# Altium PCB Kicker_PCB.PcbDoc
Units mil, origin at the board's own origin, x right, y up, seen from the top; angles counter-clockwise.
Board outline 2667.72 x 1696 mil, 2 copper layers (Top Layer, Bottom Layer); 49 components, 29 nets, 154 pads, 561 vias.
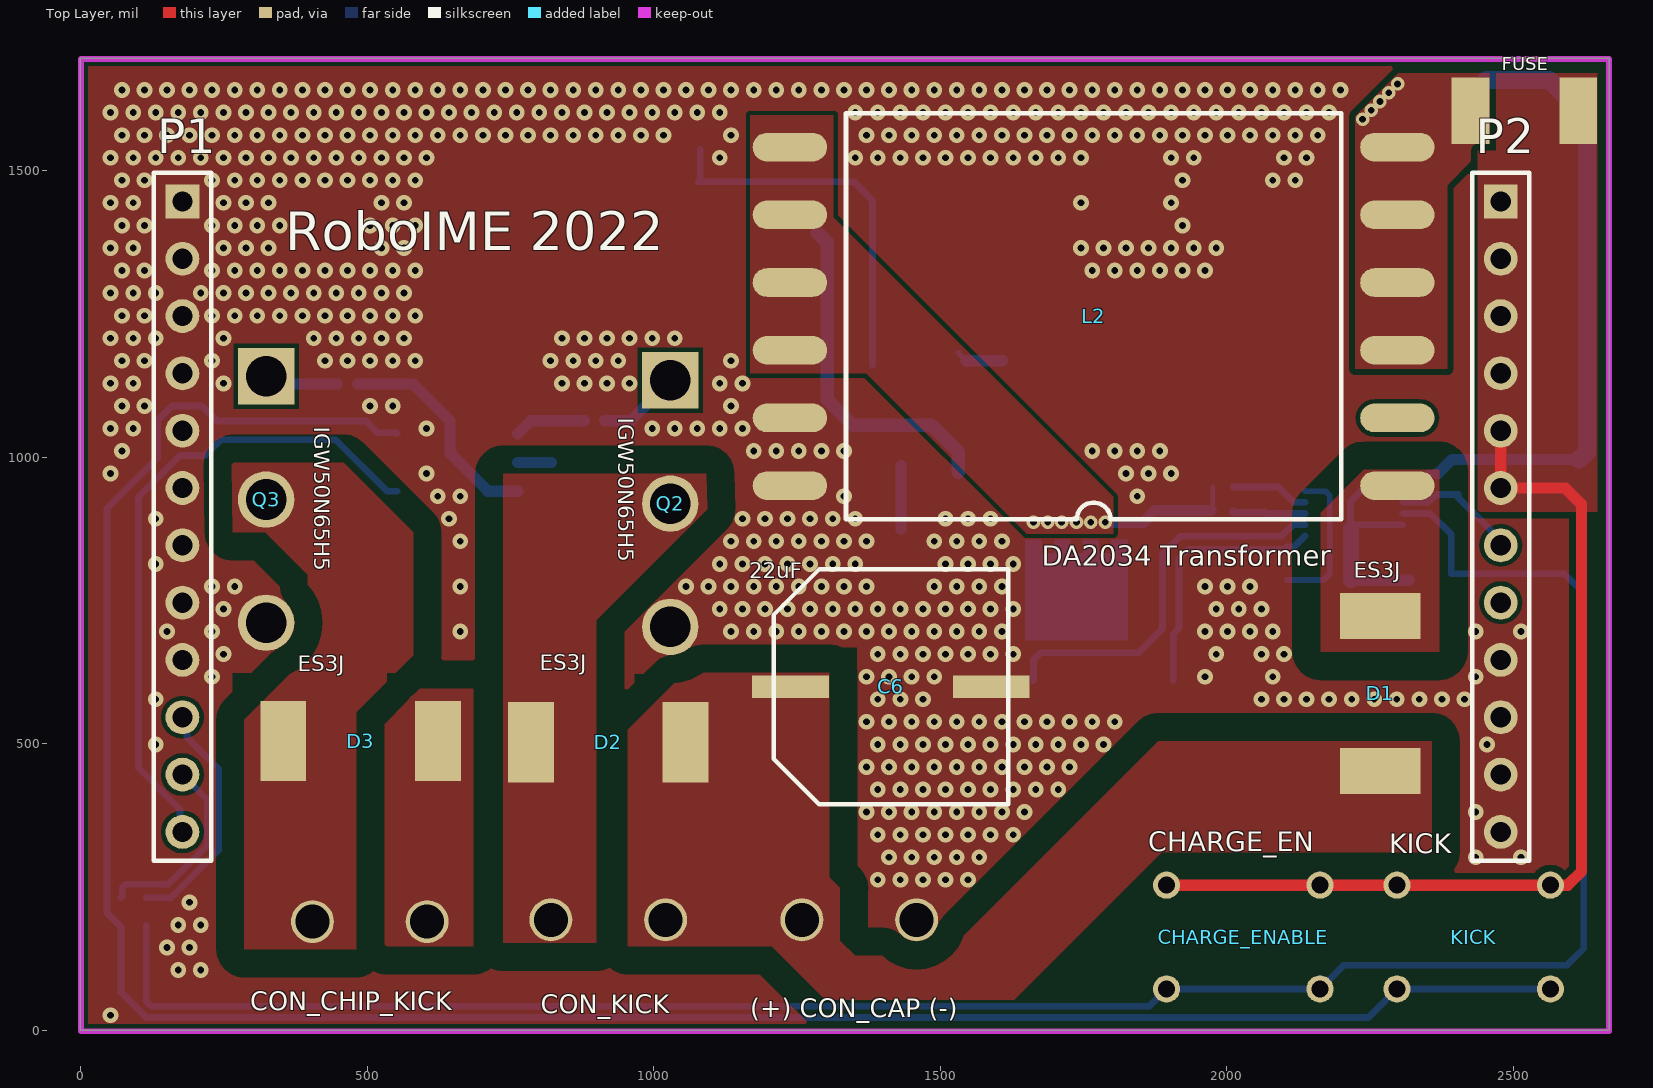
[diagram p0: Top Layer view]
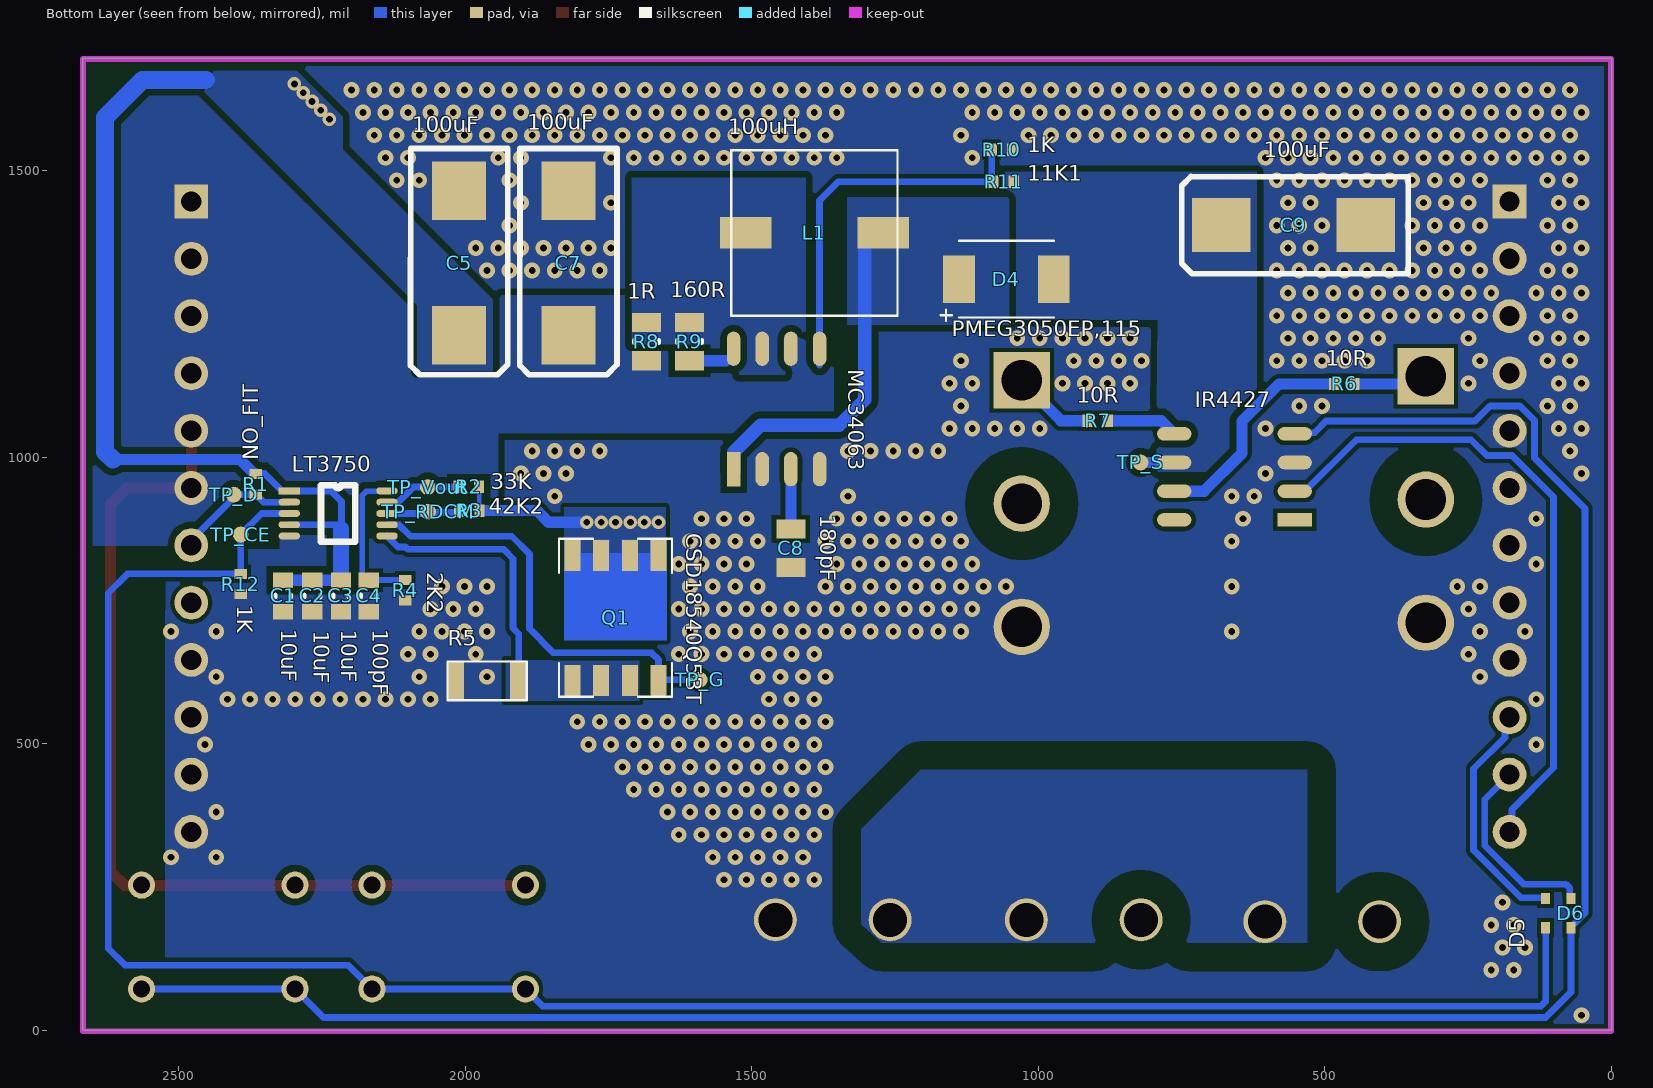
[diagram p1: Bottom Layer view, seen from below]
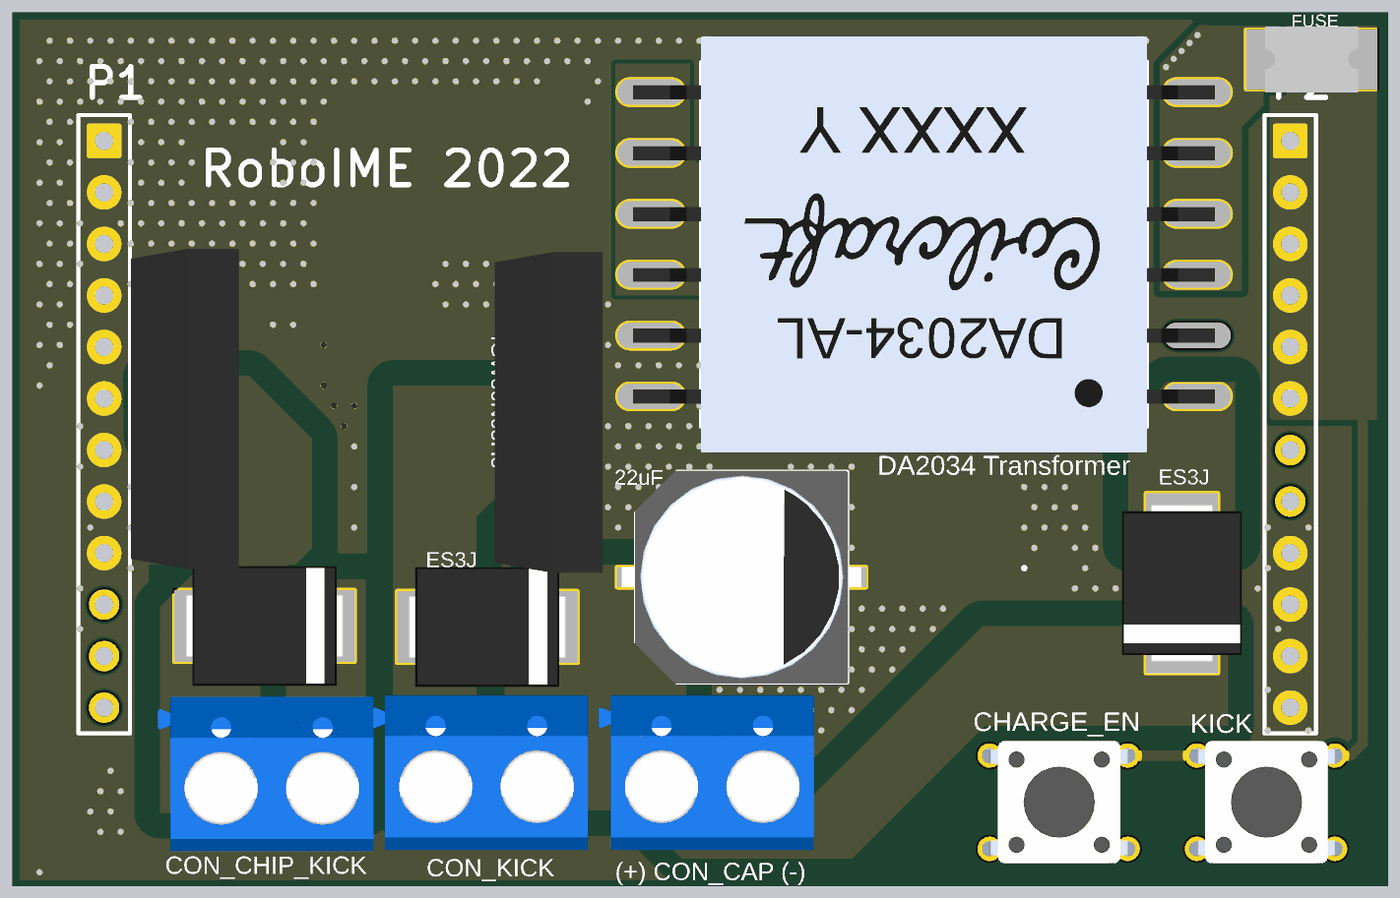
[diagram p2: 3D render of the assembled board from above, using the file's embedded part models]

## Layer stack, top to bottom
Top Solder: solder mask 0.4, Solder Resist, Dk 3.5
Top Layer: signal copper 1.4
Dielectric 1: dielectric 12.6, FR-4, Dk 4.8
Bottom Layer: signal copper 1.4
Bottom Solder: solder mask 0.4, Solder Resist, Dk 3.5

## Board outline
2667.72,0 2667.72,1696 0,1696 0,0 1291.89,0

## Design rules (kind name [scope] priority, off if disabled: settings)
BoardOutlineClearance [All] p1: gap=10 ignorepadtopadclearanceinfootprint=FALSE
Clearance Clearance_1 [InNet('NetC1_1') vs InNet('NetC1_1')] p1: gap=0 ignorepadtopadclearanceinfootprint=TRUE
Clearance VCC/Vs [InNetClass('VCC/Vs')] p2: gap=11.81 ignorepadtopadclearanceinfootprint=TRUE
Clearance NetLT3750_6 [OnLayer('Top Layer') vs InNet('NetLT3750_6')] p3: gap=19.68 ignorepadtopadclearanceinfootprint=TRUE
Clearance HV [InNetClass('HV')] p4: gap=49.21 ignorepadtopadclearanceinfootprint=TRUE
Clearance [All] p5: gap=7.48 ignorepadtopadclearanceinfootprint=TRUE
DiffPairsRouting [All] p1: maxlimit=10 minlimit=10 mostfreqgap=10 substack1={2A343E79-8AAB-4CB2-AFE3-8EEE1BD6B620} toplayer_{2a343e79-8aab-4cb2-afe3-8eee1bd6b620}_minwidth=15 toplayer_{2a343e79-8aab-4cb2-afe3-8eee1bd6b620}_maxwidth=15 toplayer_{2a343e79-8aab-4cb2-afe3-8eee1bd6b620}_prefwidth=15 bottomlayer_{2a343e79-8aab-4cb2-afe3-8eee1bd6b620}_minwidth=15 bottomlayer_{2a343e79-8aab-4cb2-afe3-8eee1bd6b620}_maxwidth=15 bottomlayer_{2a343e79-8aab-4cb2-afe3-8eee1bd6b620}_prefwidth=15 toplayer_minwidth=15 toplayer_maxwidth=15 toplayer_prefwidth=15 bottomlayer_minwidth=15 bottomlayer_maxwidth=15 bottomlayer_prefwidth=15 maxuncoupledlength=500
Height [All] p1: minheight=0 maxheight=1968.5 prefheight=500
PlaneClearance [InNet('NetC1_1')] p1: clearance=0
PlaneConnect [All] p1: planeconnectstyle=Direct reliefexpansion=20 reliefentries=4 reliefconductorwidth=10 reliefairgap=10
PolygonConnect [All] p1: connectstyle=Direct reliefconductorwidth=10 reliefentries=4 polygonreliefangle="90 Angle" airgapwidth=10
RoutingVias [All] p1: holewidth=11.81 width=23.62 viastyle="Through Hole" minholewidth=11.81 minwidth=23.62 maxholewidth=78.74 maxwidth=78.74
SolderMaskExpansion SolderMaskExpansion_1 [IsVia] p1: expansion=4 istentingtop=TRUE
SolderMaskExpansion [All] p2: expansion=4 istentingtop=FALSE
Width [All] p1: maxlimit=196.85 minlimit=7.87 preferedwidth=7.87 substack1={2A343E79-8AAB-4CB2-AFE3-8EEE1BD6B620}
26 further rules are at their usual default settings.

## Classes and differential pairs
net class HV: Cap+ CHIP_KICK- KICK- NetD1_D1-
net class VCC/Vs: NetC1_1 NetD4_2 NetL1_2 VCC Vs

## Components (designator, comment, footprint, x,y, rotation, side; value= is the part's Value field where it differs from the comment)
"(+) CON_CAP (-)" "OSTTA024163" "TERM BLOCK 2P" 1358.89,193 r0 top (schematic designator CON_CAP)
C1 "10uF" CAPC0603(1608)55_L 2317.89,758.09 r270 bottom
C2 "10uF" CAPC0603(1608)55_L 2266.89,758.09 r270 bottom
C3 "10uF" CAPC0603(1608)55_L 2216.89,758.09 r270 bottom
C4 "100pF" CAPC0603(1608)55_L 2168.58,758.09 r90 bottom
C5 "100uF" 7343-CAPPOL 2010.61,1339 r90 bottom
C6 "22uF" "CAP ALUM 22UF 250V" 1413.98,599.61 r180 top
C7 "100uF" 7343-CAPPOL 1819.89,1339 r90 bottom
C8 "180pF" 0805-CAP 1431.83,841.54 r90 bottom
C9 "100uF" 7343-CAPPOL 554.89,1405 r180 bottom
CHARGE_ENABLE "CHARGE_EN" "TACTILE SWITCH" 2028.89,163 r180 top
CON_CHIP_KICK "OSTTA024163" "TERM BLOCK 2P" 504.89,190 r0 top
CON_KICK "OSTTA024163" "TERM BLOCK 2P" 920.89,193 r0 top
D1 "ES3J" DIODE 2267.89,588 r90 top
D2 "ES3J" DIODE 920.89,503 r180 top
D3 "ES3J" DIODE 488.89,505 r180 top
D4 "PMEG3050EP,115" PCBComponent#1 1055.89,1311 r0 bottom
D5 "BAS40 Diode" "DIODE SOD-523" 115.02,204.84 r270 bottom
D6 "BAS40 Diode" "DIODE SOD-523" 70.89,204.84 r270 bottom
FUSE "MF-MSMF250/16X-2" MF-MSMF250/16X-PCB 2519.29,1604.72 r180 top
IR4427 "GATE DRIVER" IR4427 657.89,966 r0 bottom
KICK "KICK" "TACTILE SWITCH" 2430.89,163 r180 top
L1 "100uH" INDUCTOR 1390.89,1392 r0 bottom
L2 "DA2034 Transformer" "DA2034 TRANSFORMER" 2297.73,950.67 r180 top
LT3750 "Flyback Regulator" LT3750 2307.05,941.46 r180 bottom
MC34063 "Switching Voltage Regulator" DIP-8 1531.89,974.4 r90 bottom
P1 "Header 12" HDR1X12 177.98,1446.47 r270 top
P2 "Header 12" HDR1X12 2477.98,1446.47 r270 top
Q1 "CSD18540Q5BT" PCBComponent#2 1737.89,720 r270 bottom
Q2 "IGW50N65H5" IGW50N65H5 1029.13,919.29 r270 top
Q3 "IGW50N65H5" IGW50N65H5 324.02,926.38 r270 top
R1 "NO_FIT" 0402-RES-HD 2365.89,953 r270 bottom value=100k
R2 "33K" 0402-RES-HD 1993.73,948.94 r180 bottom
R3 "42K2" 0402-RES-HD 1993.05,906.85 r180 bottom value=42.2K
R4 "2K2" 0402-RES-HD 2104.58,768.09 r270 bottom value=2.2K
R5 "15m" RES1206 1961.89,611 r0 bottom
R6 "10R" 0402-RES-HD 466.01,1128 r180 bottom value=10
R7 "10R" 0402-RES-HD 896.55,1064 r0 bottom value=10
R8 "1R" 0805-RES 1683.89,1202 r90 bottom
R9 "160R" 0805-RES 1608.89,1202 r90 bottom value=160
R10 "1K" 0402-RES-HD 1063.61,1537 r0 bottom
R11 "11K1" 0402-RES-HD 1060.89,1481 r0 bottom value=11k1
R12 "1K" 0402-RES-HD 2391.89,779 r90 bottom
TP_CE "" TP-PCB 2391.89,865.32 r90 bottom net-tie
TP_D "" TP-PCB 2403.89,935 r90 bottom locked net-tie
TP_G "" TP-PCB 1590.94,611.81 r90 bottom locked net-tie
TP_RDCM "" TP-PCB 2064.96,905 r90 bottom net-tie
TP_S "" TP-PCB 821.89,991 r90 bottom locked net-tie
TP_Vout "" TP-PCB 2065.35,948.09 r90 bottom net-tie

## Footprints (in the part's own frame and the unit in brackets; to place one, negate y for a bottom-side part, rotate by r counter-clockwise, add the part's x,y. Pads: shape width x height; smd on the part's side, far side on the other; paste and mask are expansions set on the pad)
0402-RES-HD [mm] "Chip Resistor, Body 1.0x0.5mm, IPC High Density"
  rect 0.45x0.55 smd: 1(-0.45,0) 2(0.45,0)
  body extent -0.52,-0.27 0.53,0.28, height 0.4
0805-CAP [mm] "Chip Resistor, Body 2.0x1.3mm, IPC High Density"
  rect 0.85x1.3 smd: 1(-0.85,0) 2(0.85,0)
  body extent -1.1,-0.67 1.1,0.68, height 0.7
0805-RES [mm] "Chip Resistor, Body 2.0x1.3mm, IPC High Density"
  rect 0.85x1.3 smd: 1(-0.85,0) 2(0.85,0)
  silkscreen extent -0.05,-0.55 0.05,0.55, body extent -1.1,-0.67 1.1,0.68, height 0.7
7343-CAPPOL [mm] "SMT Capacitor, 2 Leads, Body 7.3x4.3mm"
  rect 2.6x2.4 smd: 1(-3.202,0.007) 2(3.198,0.007)
  silkscreen extent -4.95,-2.15 5.08,2.16, body extent -3.49,-2.03 3.51,2.04, height 4.05
"CAP ALUM 22UF 250V" [mm] "22uF"
  rect 3.4x1 smd: Cap+(4.445,0) Cap-(-4.445,0)
  silkscreen extent -5.2,-5.2 5.2,5.2, body extent -5.9,-5.25 5.9,5.25, height 10.46
CAPC0603(1608)55_L [mm] "Chip Capacitor, Body 1.6x0.8mm, Height 0.55mm, IPC High Density"
  rect 0.7x0.9 smd: 1(-0.7,0) 2(0.7,0)
  silkscreen extent -0.05,-0.35 0.05,0.35, body extent -0.87,-0.47 0.88,0.48, height 0.55
"DA2034 TRANSFORMER" [mm]
  oval 3.3x1.27 smd: 1(0,0) 2(0,-3) 3(0,-6) 4(0,-9) 5(0,-12) 6(0,-15) 7(26.92,-15) 8(26.92,-12) 9(26.92,-9) 10(26.92,-6) 11(26.92,-3) 23(26.92,0)
  silkscreen extent 2.48,-16.5 24.44,1.5, body extent -0.86,-17.78 27.79,2.79, height 11.18
DIODE [mil]
  rect 80x140 smd: D1+(-135,0) D1-(135,0)
  body extent -154,-116 154,116, height 95
"DIODE SOD-523" [mm]
  rect 0.5x0.4 smd mask+0.05: 1(-0.65,0) 2(0.65,0)
  body extent -0.8,-0.4 0.8,0.4, height 0.7
DIP-8 [mm] "MC34063 Footprint"
  rect 1.52x0.6 smd: 1(0.127,0)
  oval 1.52x0.6 smd: 2(0.127,-1.27) 3(0.127,-2.54) 4(0.127,-3.81) 5(5.461,-3.81) 6(5.461,-2.54) 7(5.461,-1.27) 8(5.461,0)
  body extent -0.21,-4.35 5.79,0.55, height 1.75
HDR1X12 [mm] "Connector; Header; 12 Position"
  rect 1.5x1.5 hole 0.9: 1(0,0)
  round 1.5 hole 0.9: 2(2.54,0) 3(5.08,0) 4(7.62,0) 5(10.16,0) 6(12.7,0) 7(15.24,0) 8(17.78,0) 9(20.32,0) 10(22.86,0) 11(25.4,0) 12(27.94,0)
  silkscreen extent -1.27,-1.27 29.21,1.27
IGW50N65H5 [mm] "IGBT Transistors 600V FAST 1-8 KHZ COPACK IGBT"
  rect 2.5x2.5 hole 1.8: 1(-5.461,0)
  round 2.5 hole 1.8: 2(0,0) 3(5.461,0)
  body extent -7.9,-2.39 7.9,2.92, height 34.13
INDUCTOR [mil]
  rect 90x55 smd: 1(-120,0) 2(120,0)
  silkscreen extent -145,-144 145,145, body extent -145,-139 142,149, height 180
IR4427 [mm]
  rect 1.52x0.6 smd: 1(-2.667,1.905)
  oval 1.52x0.6 smd: 2(-2.667,0.635) 3(-2.667,-0.635) 4(-2.667,-1.905) 5(2.667,-1.905) 6(2.667,-0.635) 7(2.667,0.635) 8(2.667,1.905)
  body extent -3,-2.45 3,2.45, height 1.75
LT3750 [mm]
  rect 0.95x0.305 smd: 1(0,0)
  oval 0.95x0.305 smd: 2(0,-0.5) 3(0,-1) 4(0,-1.5) 5(0,-2) 6(4.33,-2) 7(4.33,-1.5) 8(4.33,-1) 9(4.33,-0.5) 10(4.33,0)
  silkscreen extent 1.41,-2.25 2.92,0.25, body extent -0.29,-2.52 4.61,0.48, height 1.15
MF-MSMF250/16X-PCB [mm] "Chip PTC RESETTABLE"
  rect 1.68x2.95 smd: 1(-2.39,0) 2(2.39,0)
  body extent -2.3,-1.62 2.3,1.62, height 1.15
PCBComponent#1 [mm]
  rect 1.4x2.1 smd: 1(-2.1,0) 2(2.1,0)
  silkscreen extent -2.1,-1.7 2.93,1.85, body extent -2.5,-1.35 2.5,1.35, height 1.1
PCBComponent#2 [mm]
  rect 1.372x0.711 smd: 1(2.769,-1.905) 2(2.769,-0.635) 3(2.769,0.635) 4(2.769,1.905) 5(-2.769,1.905) 6(-2.769,0.635) 7(-2.769,-0.635) 8(-2.769,-1.905)
  Top Layer region: -3.454,2.261 0.991,2.261 0.991,-2.261 -3.454,-2.261 -3.454,-1.549 -2.87,-1.549 -2.87,-0.991 -3.454,-0.991 -3.454,-0.279 -2.87,-0.279 -2.87,0.279 -3.454,0.279 -3.454,0.991 -2.87,0.991 -2.87,1.549 -3.454,1.549
  silkscreen extent -3.5,-2.5 3.5,2.5, body extent -3.28,-2.53 2.72,2.47, height 1.1
RES1206 [mil]
  rect 30x65 smd: 1(-55,0) 2(55,0)
  silkscreen extent -69,-33 69,35, body extent -63,-33 63,33, height 21
"TACTILE SWITCH" [mm]
  round 1.2 hole 0.75: 1(-3.4,-2.3) 2(3.4,-2.3) 3(-3.4,2.3) 4(3.4,2.3)
  body extent -3.9,-3.01 3.85,3.02, height 3.01
"TERM BLOCK 2P" [mm]
  round 1.9 hole 1.5: 1(-2.54,0) 2(2.54,0)
  body extent -5.64,-3.1 4.96,4.5, height 10
TP-PCB [mm]
  round 0.7 smd paste-1: 1(0,0)

## Part data
"(+) CON_CAP (-)" CON_CHIP_KICK CON_KICK: library part "Term Block 2P", "2 Position Wire to Board Terminal Block Horizontal with Board 0.200\" (5.08mm) Through Hole"
C1 C2 C3: library part C0603-10uF-16V-1, "CAP CER 10UF 16V X5R 0603", Part No=EMK107BBJ106MA-T, Cod EMS=05.281.019.592
C4: library part CC0603--1, "CAP CER 100PF 50V NP0 0603", Part No=GRM1885C1H101JA01D
C5 C7 C9: library part CT2917-100uF-1, "CAP TANT 100uF 25V 20% ESR = 30mOhm @ 100 kHz", Part No=T521X107M025ATE030
C6: library part "CAP ALUM 22UF 250V"
C8: library part CC0805-180pF-2, "CAP CER 180PF 50V NP0 0805", Part No=C0805C181K5GACTU, Cod EMS=05.281.019.399
CHARGE_ENABLE KICK: library part SW-SPST, "Single-Pole, Single-Throw Switch", LatestRevisionDate=17-Jul-2002, LatestRevisionNote="Re-released for DXP Platform.", PackageDescription="Switch; 2 Leads", PackageReference=SPST-2, Published=24-Mar-1999, Publisher="Altium Limited"
D4: library part PMEG3050EP,115-01.A.5, "DIODE SCHOTTKY 30V 5A SOD128", Cod EMS=05.284.051.031, Part No=PMEG3050EP,115
FUSE: "PTC RESETTABLE"
IR4427: library part IR4427, "IC DRIVER DUAL LOW SIDE 8-SOIC"
L1: library part Inductor, "Fixed Inductors 100uH 0.86A SMT"
LT3750: library part LT3750
MC34063: library part MC34063
P1 P2: "Header, 12-Pin", LatestRevisionDate=17-Jul-2002, LatestRevisionNote="Re-released for DXP Platform.", Publisher="Altium Limited"
Q1: library part CSD18540Q5BT-1, "MOSFET N-CH 60V 100A 8VSON", Part No=CSD18540Q5BT
Q2 Q3: "650 V IGBT High Speed Switching Series Fifth Generation, 80 A IC, PG-TO247-3-44, Tube, Green", Manufacturer=Infineon, Supplier Part Number 1=N/A, Switching Frequency="TRENCHSTOP5 10-120 kHz", ComponentLink1Description="Manufacturer URL", ComponentLink1URL=http://www.infineon.com/, ComponentLink2Description=Datasheet, ComponentLink2URL=http://www.infineon.com/dgdl/DS_IGW50N65H5_1_1.pdf?folderId=db3a3043156fd5730115f56849b61941&fileId=db3a30433af5291e013af900f52c5c25&location=en.Products.IGBTs.IGBT_with_Anti-Parallel_Diode.TRENCHSTOP_5.DATASHEET.DS_IGW50N65H5_1_1.pdf, ComponentLink3Description="Package Specification", ComponentLink3URL=http://www.infineon.com/cms/packages/Leaded_and_through-hole/P-PG-TO247/P-PG-TO247-3-44.html?__locale=en, DatasheetVersion="Rev. 1.1", Green=TRUE, Group="IGBT without Anti-Parallel Diode", Halogen-free=available, IC(max)@ 25degrees="80 A", IC(max)@ 100degrees="56 A", ICpuls(max)="150 A", Mounting Technology="Through Hole", PackageDescription="3-Pin Plastic (Green) Transistor Single Outline Package, 15.94 x 20.95 mm Body, 5.44 mm Pitch", PackageReference=PG-TO247-3-44, PackageVersion="Rev. 03", Packing=Tube, PartNumber=IGW50N65H5, Ptot(max)="305 W", Supplier 1=Mouser, VCE(max)="650 V", VCE(sat)(typ)="1.65 V"
R1: library part R0402-100K-11, "NÃO SOLDAR 100K 0402 SMD", Part No=ERJ-2GEJ104X, Cod EMS=05.280.029.504, Family=ERJ-2GE....X, Family Description="RESISTOR FILME ESPESSO 0R-1M / 1/10W / 5% /  0402. P/N: ERJ-2GE....X – PANASONIC ELECTRONIC COMPONENTS."
R2: library part R0402-33K-7, "RES 33K OHM 1/10W 1% 0402 SMD", Part No=ERJ-2RKF3302X, Cod EMS=05.280.029.535, Family=ERJ-2RKF....X, Family Description="RESISTOR FILME ESPESSO 10R-1M / 1/10W / 1% / 0402. P/N: ERJ-2RKF....X – PANASONIC ELECTRONIC COMPONENTS."
R3: library part RESISTOR, "RES 42.2K OHM 1/10W 1% 0402 SMD", Part No=ERJ-2RKF4222X
R4: library part R0402-2K2-5, "RES 2.2K OHM 1/10W 1% 0402 SMD", Part No=ERJ-2RKF2201X, Cod EMS=05.280.029.541, Family=ERJ-2RKF....X, Family Description="RESISTOR FILME ESPESSO 10R-1M / 1/10W / 1% / 0402. P/N: ERJ-2RKF....X – PANASONIC ELECTRONIC COMPONENTS."
R5: library part Res2, "Resistor", LatestRevisionDate=17-Jul-2002, LatestRevisionNote="Re-released for DXP Platform.", PackageDescription="Axial Device, Thru-Hole; 2 Leads; 0.4 in Pin Spacing", PackageReference=AXIAL-0.4, Published=8-Jun-2000, Publisher="Altium Limited"
R6 R7: library part R0402-10R-6, "RES 10 OHM 1/10W 1% 0402 SMD", Part No=ERJ-2RKF10R0X, Cod EMS=05.280.029.523, Family=ERJ-2RKF....X, Family Description="RESISTOR FILME ESPESSO 10R-1M / 1/10W / 1% / 0402. P/N: ERJ-2RKF....X – PANASONIC ELECTRONIC COMPONENTS."
R8: library part R0805-1R-1%-1, "RES SMD 1 OHM 1% 1/8W 0805", Part No=CRCW08051R00FKEA, Cod EMS=05.280.029.391
R9: library part R0805-160R-5, "RES 160 OHM 1/8W .5% 0805 SMD", Part No=ERA-6AED161V, Cod EMS=05.280.029.516, Family=ERA-6AED...V
R10 R12: library part R0402-1K-A.9, "RES 1K OHM 1/10W 1% 0402 SMD", Part No=ERJ-2RKF1001X, Cod EMS=05.280.029.527, Family=ERJ-2RKF....X, Family Description="RESISTOR FILME ESPESSO 10R-1M / 1/10W / 1% / 0402. P/N: ERJ-2RKF....X – PANASONIC ELECTRONIC COMPONENTS."
R11: library part R0402-11K1-1, "RES 11.1 KOHM 1/16W 0.1% 0402 SMD", Part No=TNPW040211K1BEED
TP_CE TP_D TP_G TP_RDCM TP_S TP_Vout: library part TESTPOINT-CMP-2, "TESTPOINT"

## Via types
v1: diameter 27.56, hole 11.81, Top Layer to Bottom Layer, tented both sides, 550 vias
v2: diameter 23.62, hole 11.81, Top Layer to Bottom Layer, tented both sides, 11 vias

## Nets (pads, with @x,y where several pads share a name; then routed paths per layer and width w, separated by ;. In a path a pad name is that pad's centre, name@x,y a point inside that pad or via, vN(x,y) a via of type N, cw(c..) or ccw(c..) an arc to the next point about the centre after c; other vN are vias at no path point)
Cap+: "(+) CON_CAP (-).1" C6.Cap+ CON_CHIP_KICK.2 CON_KICK.2 D1.D1+ D2.D1+ D3.D1+
CHARGE_ENABLE: CHARGE_ENABLE.3 CHARGE_ENABLE.4 D5.2 LT3750.3 R12.2 TP_CE.1 | length 3719.1
  Bottom Layer w11.81: D5.2@115.02,183.19 115.02,50.61 123.17,42.46 1865.04,42.46 CHARGE_ENABLE.4 CHARGE_ENABLE.3 2204.3,114 2593.89,114 2622.89,143 2622.89,763 2589.17,796.72 R12.2 TP_CE.1 2355.11,902.09 LT3750.3
CHIP_KICK: Q3.1 R6.2 | length 144.5
  Bottom Layer w19.68: Q3.1@305.89,1140.09 Q3.1@310.89,1135.09 ; Q3.1@310.89,1128 R6.2
CHIP_KICK-: CON_CHIP_KICK.1 D3.D1- Q3.2
CHIP_KICK_SIGNAL: IR4427.2 P1.12 | length 1146.5
  Bottom Layer w11.81: P1.12 173.95,350.5 173.95,385.64 101.15,458.44 101.15,930.89 173.42,1003.17 217.36,1003.17 244.91,1030.71 445.07,1030.71 534.78,941 IR4427.2
DONE: LT3750.2 P2.7 R1.2 TP_D.1 | length 221.8
  Bottom Layer w11.81: LT3750.2 2352.38,921.78 R1.2 2403.61,935.28 TP_D.1 2403.89,929.67 2477.98,855.59 P2.7
GATE: LT3750.7 Q1.4 TP_G.1 | length 756.6
  Bottom Layer w11.81: TP_G.1 Q1.4@1662.89,611.81 ; Q1.4@1662.13,610.24 Q1.4 Q1.4@1662.89,611.81 ; LT3750.7 2136.47,882.3 2115.27,882.3 2095.3,862.33 1918.88,862.33 1888.11,831.56 1888.11,701.22 1845.89,659 1674.89,659 1662.89,647 Q1.4@1662.89,611.81
GND: "(+) CON_CAP (-).2" C1.2 C2.2 C3.2 C4.1 C5.2 C6.Cap- C7.2 C8.1 C9.2 IR4427.3 L2.11 L2.23 LT3750.5 MC34063.2 MC34063.4 P1.1 P1.2 P1.3 P1.4 P1.5 P1.6 P1.7 P1.8 P1.9 P2.9 P2.10 P2.11 P2.12 Q2.3 Q3.3 R4.2 R5.2 R10.1 R12.1 | length 22.4
  Bottom Layer w10: P1.6 P1.6@200.36,946.47
  other v1: 52.63,26.71 170.74,105.45 210.11,105.45 151.05,144.82 190.42,144.82 170.74,184.19 210.11,184.19 190.42,223.56 1391.21,262.93 1430.58,262.93 1469.95,262.93 1509.32,262.93 1548.69,262.93 1410.89,302.3 1450.26,302.3 1489.63,302.3 1529,302.3 1568.37,302.3 2434.52,302.3 2513.26,302.3 1391.21,341.67 1430.58,341.67 1469.95,341.67 1509.32,341.67 1548.69,341.67 1588.06,341.67 1627.43,341.67 1371.52,381.04 1410.89,381.04 1450.26,381.04 1489.63,381.04 1529,381.04 1568.37,381.04 1607.74,381.04 1647.11,381.04 2434.52,381.04 1391.21,420.41 1430.58,420.41 1469.95,420.41 1509.32,420.41 1548.69,420.41 1588.06,420.41 1627.43,420.41 1666.8,420.41 1706.17,420.41 1371.52,459.78 1410.89,459.78 1450.26,459.78 1489.63,459.78 1529,459.78 1568.37,459.78 1607.74,459.78 1647.11,459.78 1686.48,459.78 1725.85,459.78 131.37,499.15 1391.21,499.15 1430.58,499.15 1469.95,499.15 1509.32,499.15 1548.69,499.15 1588.06,499.15 1627.43,499.15 1666.8,499.15 1706.17,499.15 1745.54,499.15 1784.91,499.15 2454.2,499.15 1371.52,538.52 1410.89,538.52 1450.26,538.52 1489.63,538.52 1529,538.52 1568.37,538.52 1607.74,538.52 1647.11,538.52 1686.48,538.52 1725.85,538.52 1765.22,538.52 1804.59,538.52 131.37,577.89 1391.21,577.89 1430.58,577.89 1469.95,577.89 2060.5,577.89 2099.87,577.89 2139.24,577.89 2178.61,577.89 2217.98,577.89 2257.35,577.89 2296.72,577.89 2336.09,577.89 2375.46,577.89 2414.83,577.89 229.79,617.26 1371.52,617.26 1410.89,617.26 1450.26,617.26 1489.63,617.26 1962.08,617.26 2080.19,617.26 2434.52,617.26 249.48,656.63 1391.21,656.63 1430.58,656.63 1469.95,656.63 1509.32,656.63 1548.69,656.63 1588.06,656.63 1627.43,656.63 1981.76,656.63 2060.5,656.63 2099.87,656.63 151.05,696 229.79,696 662.86,696 1135.3,696 1174.67,696 1214.04,696 1253.41,696 1292.78,696 1332.15,696 1371.52,696 1410.89,696 1450.26,696 1489.63,696 1529,696 1568.37,696 1607.74,696 1962.08,696 2001.45,696 2040.82,696 2080.19,696 2434.52,696 2513.26,696 249.48,735.37 1115.62,735.37 1154.99,735.37 1194.36,735.37 1233.73,735.37 1273.1,735.37 1312.47,735.37 1351.84,735.37 1391.21,735.37 1430.58,735.37 1469.95,735.37 1509.32,735.37 1548.69,735.37 1588.06,735.37 1627.43,735.37 1981.76,735.37 2021.13,735.37 2060.5,735.37 229.79,774.74 269.16,774.74 662.86,774.74 1056.56,774.74 1095.93,774.74 1135.3,774.74 1174.67,774.74 1214.04,774.74 1253.41,774.74 1292.78,774.74 1332.15,774.74 1371.52,774.74 1489.63,774.74 1529,774.74 1568.37,774.74 1607.74,774.74 1962.08,774.74 2001.45,774.74 2040.82,774.74 131.37,814.11 1115.62,814.11 1154.99,814.11 1194.36,814.11 1233.73,814.11 1273.1,814.11 1312.47,814.11 1351.84,814.11 1509.32,814.11 1548.69,814.11 1588.06,814.11 1627.43,814.11 662.86,853.48 1135.3,853.48 1174.67,853.48 1214.04,853.48 1253.41,853.48 1292.78,853.48 1332.15,853.48 1371.52,853.48 1489.63,853.48 1529,853.48 1568.37,853.48 1607.74,853.48 131.37,892.85 643.18,892.85 1154.99,892.85 1194.36,892.85 1233.73,892.85 1273.1,892.85 1312.47,892.85 1351.84,892.85 1509.32,892.85 1548.69,892.85 1588.06,892.85 623.49,932.22 662.86,932.22 1332.15,932.22 1843.96,932.22 52.63,971.59 603.81,971.59 1824.28,971.59 1863.65,971.59 1903.02,971.59 72.31,1010.96 1174.67,1010.96 1214.04,1010.96 1253.41,1010.96 1292.78,1010.96 1332.15,1010.96 1765.22,1010.96 1804.59,1010.96 1843.96,1010.96 1883.34,1010.96 52.63,1050.33 92,1050.33 603.81,1050.33 997.51,1050.33 1036.88,1050.33 1076.25,1050.33 1115.62,1050.33 1154.99,1050.33 72.31,1089.7 111.68,1089.7 505.38,1089.7 544.75,1089.7 1135.3,1089.7 52.63,1129.07 92,1129.07 249.48,1129.07 840.03,1129.07 879.4,1129.07 918.77,1129.07 958.14,1129.07 1115.62,1129.07 1154.99,1129.07 72.31,1168.44 111.68,1168.44 229.79,1168.44 426.64,1168.44 466.01,1168.44 505.38,1168.44 544.75,1168.44 584.12,1168.44 820.34,1168.44 859.71,1168.44 899.08,1168.44 938.45,1168.44 1135.3,1168.44 52.63,1207.81 92,1207.81 131.37,1207.81 249.48,1207.81 406.96,1207.81 446.33,1207.81 485.7,1207.81 525.07,1207.81 564.44,1207.81 840.03,1207.81 879.4,1207.81 918.77,1207.81 958.14,1207.81 997.51,1207.81 1036.88,1207.81 72.31,1247.18 111.68,1247.18 229.79,1247.18 269.16,1247.18 308.53,1247.18 347.9,1247.18 387.27,1247.18 426.64,1247.18 466.01,1247.18 505.38,1247.18 544.75,1247.18 584.12,1247.18 52.63,1286.55 92,1286.55 131.37,1286.55 210.11,1286.55 249.48,1286.55 288.85,1286.55 328.22,1286.55 367.59,1286.55 406.96,1286.55 446.33,1286.55 485.7,1286.55 525.07,1286.55 564.44,1286.55 72.31,1325.92 111.68,1325.92 229.79,1325.92 269.16,1325.92 308.53,1325.92 347.9,1325.92 387.27,1325.92 426.64,1325.92 466.01,1325.92 505.38,1325.92 544.75,1325.92 584.12,1325.92 1765.22,1325.92 1804.59,1325.92 1843.96,1325.92 1883.34,1325.92 1922.71,1325.92 1962.08,1325.92 52.63,1365.29 92,1365.29 249.48,1365.29 288.85,1365.29 328.22,1365.29 525.07,1365.29 564.44,1365.29 1745.54,1365.29 1784.91,1365.29 1824.28,1365.29 1863.65,1365.29 1903.02,1365.29 1942.39,1365.29 1981.76,1365.29 72.31,1404.66 111.68,1404.66 229.79,1404.66 269.16,1404.66 308.53,1404.66 347.9,1404.66 505.38,1404.66 544.75,1404.66 584.12,1404.66 1922.71,1404.66 52.63,1444.03 92,1444.03 249.48,1444.03 288.85,1444.03 328.22,1444.03 525.07,1444.03 564.44,1444.03 1745.54,1444.03 1903.02,1444.03 72.31,1483.4 111.68,1483.4 229.79,1483.4 269.16,1483.4 308.53,1483.4 347.9,1483.4 387.27,1483.4 426.64,1483.4 466.01,1483.4 505.38,1483.4 544.75,1483.4 584.12,1483.4 1922.71,1483.4 2080.19,1483.4 2119.56,1483.4 52.63,1522.77 92,1522.77 131.37,1522.77 170.74,1522.77 210.11,1522.77 249.48,1522.77 288.85,1522.77 328.22,1522.77 367.59,1522.77 406.96,1522.77 446.33,1522.77 485.7,1522.77 525.07,1522.77 564.44,1522.77 603.81,1522.77 1115.62,1522.77 1351.84,1522.77 1391.21,1522.77 1430.58,1522.77 1469.95,1522.77 1509.32,1522.77 1548.69,1522.77 1588.06,1522.77 1627.43,1522.77 1666.8,1522.77 1706.17,1522.77 1745.54,1522.77 1903.02,1522.77 1942.39,1522.77 2099.87,1522.77 2139.24,1522.77 72.31,1562.14 111.68,1562.14 151.05,1562.14 190.42,1562.14 229.79,1562.14 269.16,1562.14 308.53,1562.14 347.9,1562.14 387.27,1562.14 426.64,1562.14 466.01,1562.14 505.38,1562.14 544.75,1562.14 584.12,1562.14 623.49,1562.14 662.86,1562.14 702.23,1562.14 741.6,1562.14 780.97,1562.14 820.34,1562.14 859.71,1562.14 899.08,1562.14 938.45,1562.14 977.82,1562.14 1017.19,1562.14 1135.3,1562.14 1371.52,1562.14 1410.89,1562.14 1450.26,1562.14 1489.63,1562.14 1529,1562.14 1568.37,1562.14 1607.74,1562.14 1647.11,1562.14 1686.48,1562.14 1725.85,1562.14 1765.22,1562.14 1804.59,1562.14 1843.96,1562.14 1883.34,1562.14 1922.71,1562.14 1962.08,1562.14 2001.45,1562.14 2040.82,1562.14 2080.19,1562.14 2119.56,1562.14 2158.93,1562.14 52.63,1601.52 92,1601.52 131.37,1601.52 170.74,1601.52 210.11,1601.52 249.48,1601.52 288.85,1601.52 328.22,1601.52 367.59,1601.52 406.96,1601.52 446.33,1601.52 485.7,1601.52 525.07,1601.52 564.44,1601.52 603.81,1601.52 643.18,1601.52 682.55,1601.52 721.92,1601.52 761.29,1601.52 800.66,1601.52 840.03,1601.52 879.4,1601.52 918.77,1601.52 958.14,1601.52 997.51,1601.52 1036.88,1601.52 1076.25,1601.52 1115.62,1601.52 1351.84,1601.52 1391.21,1601.52 1430.58,1601.52 1469.95,1601.52 1509.32,1601.52 1548.69,1601.52 1588.06,1601.52 1627.43,1601.52 1666.8,1601.52 1706.17,1601.52 1745.54,1601.52 1784.91,1601.52 1824.28,1601.52 1863.65,1601.52 1903.02,1601.52 1942.39,1601.52 1981.76,1601.52 2021.13,1601.52 2060.5,1601.52 2099.87,1601.52 2139.24,1601.52 2178.61,1601.52 72.31,1640.89 111.68,1640.89 151.05,1640.89 190.42,1640.89 229.79,1640.89 269.16,1640.89 308.53,1640.89 347.9,1640.89 387.27,1640.89 426.64,1640.89 466.01,1640.89 505.38,1640.89 544.75,1640.89 584.12,1640.89 623.49,1640.89 662.86,1640.89 702.23,1640.89 741.6,1640.89 780.97,1640.89 820.34,1640.89 859.71,1640.89 899.08,1640.89 938.45,1640.89 977.82,1640.89 1017.19,1640.89 1056.56,1640.89 1095.93,1640.89 1135.3,1640.89 1174.67,1640.89 1214.04,1640.89 1253.41,1640.89 1292.78,1640.89 1332.15,1640.89 1371.52,1640.89 1410.89,1640.89 1450.26,1640.89 1489.63,1640.89 1529,1640.89 1568.37,1640.89 1607.74,1640.89 1647.11,1640.89 1686.48,1640.89 1725.85,1640.89 1765.22,1640.89 1804.59,1640.89 1843.96,1640.89 1883.34,1640.89 1922.71,1640.89 1962.08,1640.89 2001.45,1640.89 2040.82,1640.89 2080.19,1640.89 2119.56,1640.89 2158.93,1640.89 2198.3,1640.89
KICK: Q2.1 R7.2 | length 124.4
  Bottom Layer w19.68: R7.2 960.89,1064 Q2.1@1015.89,1119
KICK-: CON_KICK.1 D2.D1- Q2.2
KICK_SIGNAL: D6.2 IR4427.4 KICK.3 KICK.4 | length 4026
  Bottom Layer w11.81: IR4427.4 551,1042.89 518.53,1042.89 505.38,1056.04 505.38,1056.33 498.46,1063.25 238.27,1063.25 211.74,1089.78 160.04,1089.78 134.67,1064.41 134.67,999.05 46.46,910.84 46.46,204.84 70.89,180.41 70.89,66.91 115.02,22.77 2247.36,22.77 KICK.4 KICK.3
NetC1_1: C1.1 C2.1 C3.1 C5.1 FUSE.2 L2.3 L2.4 L2.5 L2.6 LT3750.1 LT3750.4 R1.1 | length 1556.1
  Bottom Layer w7.87: 2216.14,875.75 2216.89,875
  Bottom Layer w11.81: 2216.14,875.75 2216.14,923.23 2234.38,941.46 LT3750.1 2319.75,941.46 2349.99,971.7 R1.1@2365.89,971.7 ; 2224.3,882.41 LT3750.4
  Bottom Layer w19.68: C3.1 C2.1 C1.1 ; R1.1@2365.89,971.7 2368.84,971.7 2393.2,996.06 2614.96,996.06
  Bottom Layer w27.56: C3.1 2216.89,875
  Bottom Layer w31.5: 2452.36,1658.27 2562.99,1658.27 2628.35,1592.91 2628.35,1009.45 2614.96,996.06
  other v2: 2237.01,1589.76 2251.97,1605.51 2267.32,1620.87 2282.68,1636.22 2298.03,1651.57
NetC4_2: C4.2 LT3750.10 R4.1 | length 263.2
  Bottom Layer w10: R4.1 2168.42,785.81 C4.2 2179.89,796.97 2179.89,933.53 2172.77,940.65 2137.39,940.65 LT3750.10
NetC8_2: C8.2 MC34063.3 | length 110.9
  Bottom Layer w19.68: C8.2 MC34063.3@1431.83,985.94
NetD1_D1-: D1.D1- L2.1
NetD4_2: D4.2 L1.1 MC34063.1 | length 600.1
  Bottom Layer w23.62: L1.1@1285.89,1392 1302.89,1375 1302.89,1100.47 1347.32,1056.04 1484.85,1056.04 1531.89,1009 MC34063.1 MC34063.1@1531.89,974.4
NetD5_1: D5.1 P1.10 | length 418.3
  Bottom Layer w11.81: D5.1@115.02,231.59 157.97,231.59 240.97,314.59 240.97,456.67 186.17,511.47 186.17,538.28 P1.10
NetD6_1: D6.1 P1.11 | length 338.5
  Bottom Layer w11.81: D6.1@70.89,231.59 72.86,233.56 72.86,248.32 79.78,255.23 153.77,255.23 221.28,322.74 221.28,403.17 P1.11
NetIR4427_5: IR4427.5 R7.1 | length 125.5
  Bottom Layer w19.68: IR4427.5 785.89,1064 R7.1
NetIR4427_7: IR4427.7 R6.1 | length 389.7
  Bottom Layer w19.68: R6.1 580.34,1128 644.83,1063.52 644.83,1007.06 710.89,941 IR4427.7
NetL1_2: L1.2 MC34063.7 R8.2 R9.2
NetL2_7: L2.7 L2.8 L2.9 L2.10 Q1.5 Q1.6 Q1.7 Q1.8 R2.2 R3.2 | length 236.4
  Bottom Layer w7.87: R3.2@1972.62,907.09 1976.02,910.49 R2.2
  Bottom Layer w19.68: v2(1787.89,886.75) 1854.64,886.75 1874.98,907.09 R3.2@1972.62,907.09
  other v2: 1662.89,886.75 1687.89,886.75 1711.89,886.75 1737.89,886.75 1762.89,886.75
NetMC34063_5: MC34063.5 R10.2 R11.2 | length 661.1
  Bottom Layer w11.81: R10.2 1081.32,1483.72 R11.2 1348.89,1481 1381.89,1448 1381.89,1182 MC34063.5@1381.89,1161
NetMC34063_8: MC34063.8 R9.1 | length 82.6
  Bottom Layer w10: MC34063.8@1531.89,1182 1545.35,1168.54
  Bottom Layer w19.68: 1545.35,1168.54 R9.1
RDCM: LT3750.8 R3.1 TP_RDCM.1 | length 129.9
  Bottom Layer w11.81: R3.1 2010.76,903.97 TP_RDCM.1@2064.96,903.97 ; TP_RDCM.1 2067.87,902.09 LT3750.8
RVOut: LT3750.9 R2.1 TP_Vout.1 | length 136
  Bottom Layer w11.81: R2.1@2011.45,948.09 2090.39,948.09 2116.7,921.78 LT3750.9
Source: LT3750.6 Q1.1 Q1.2 Q1.3 R5.1 | length 452.4
  Bottom Layer w11.81: R5.1 1906.89,692.16 1916.8,702.07 1916.8,823.09 1933.41,839.7 2100.51,839.7 2104.36,843.55 2117.4,843.55 LT3750.6
VCC: C7.1 CHARGE_ENABLE.1 CHARGE_ENABLE.2 FUSE.1 KICK.1 KICK.2 MC34063.6 P2.1 P2.2 P2.3 P2.4 P2.5 P2.6 R8.1 | length 1627
  Top Layer w19.68: CHARGE_ENABLE.2 KICK.2 KICK.1 2594.94,253.55 2618.89,277.5 2618.89,918 2590.42,946.47 P2.6 P2.5
Vs: C9.1 D4.1 IR4427.6 R11.1 TP_S.1 | length 59
  Bottom Layer w19.68: IR4427.6 TP_S.1
pads on no net: IR4427.1 IR4427.8 L2.2 P2.8

## Polygon pours and split planes (outlines as drawn)
GND on Top Layer "GND" (solid, remove dead copper, pour order 102): 1302.89,0 0,0 0,1696 2667.72,1696 2667.72,0
KICK- on Top Layer "KICK-_L01_P095" (solid, remove dead copper, pour order 95): 1092.26,971.59 737.89,971.59 737.89,153 899.89,153 899.89,716 1093.52,909.63
NetL2_7 on Top Layer "HV L2_7" (solid, remove dead copper, pour order 93): 1168.89,1146.47 1168.89,1596.47 1313.89,1596.47 1313.89,1419 1801.89,931 1801.89,867 1651.18,867 1371.62,1145.81
NetC1_1 on Top Layer "NETC1_1_L01_P091" (solid, pour order 91): 2300.44,1670.91 2224.61,1595.09 2224.61,1154.86 2384.45,1154.86 2384.45,1474.61 2458.27,1548.43 2458.27,1670.47 2384.45,1670.47
CHIP_KICK- on Top Layer "CHIP_KICK-_L01_P094" (solid, remove dead copper, pour order 94): 265.77,869 322.89,869 396.89,795 396.89,653 285.89,542 285.89,142 480.89,142 480.89,555 580.89,655 580.89,869 459.34,990.55 263.67,990.55
Cap+ on Top Layer "Top Layer-Cap+" (solid, pour order 96): 1880.89,505 2357.89,505 2357.89,311 1886.64,311 1625.64,50 1302.89,50 1206.89,146 1206.89,275 1298.89,275 1325.89,248 1324.89,247 1324.89,157 1351.7,130.19 1506.08,130.19
VCC on Top Layer "VCC Top" (solid, remove dead copper, pour order 90): 2646.06,905 2438.19,905 2438.19,1670.47 2646.06,1670.47
Cap+ on Top Layer "CAP+_L01_P100" (solid, remove dead copper, pour order 100): 685.57,596 685.58,147.1 506.89,146.79 506.89,596
Cap+ on Top Layer "CAP+_L01_P098" (solid, remove dead copper, pour order 98): 1306.89,624 1306.89,147.17 954.89,147.17 954.89,525 1053.89,624
NetD1_D1- on Top Layer "HV D1-" (solid, remove dead copper, pour order 92): 2370.66,978 2371.11,826.83 2370.7,826.42 2370.7,661.09 2163.89,661.09 2163.89,903 2238.89,978
GND on Bottom Layer "GND_L02_P107" (solid, remove dead copper, pour order 107): 2523.89,685 2521.89,840 2323.89,840 2323.89,1694.6 0,1700.07 0,1 2521.89,1 2523.89,-1
VCC on Bottom Layer "VCC_L02_P088" (solid, remove dead copper, pour order 88): 2667.72,1696 2372.89,1696 1959.89,1283 1356.89,1283 1356.89,1042 1942.89,1042 1942.89,846 2667.72,846
NetL2_7 on Bottom Layer "NETL2_7_L02_P081" (solid, pour order 81): 1826.89,782.67 1826.89,913.03 1648.89,913.03 1649.89,912.03 1649.89,782.67
NetC1_1 on Bottom Layer "Bottom Layer-NetC1_1" (solid, pour order 82): 1951.83,1275.93 2213.39,1537.48 2213.39,1594.09 2293.7,1674.41 2465.35,1674.41 2465.35,1647.64 2083.46,1265.75 2083.46,1149.94 1951.83,1149.94
Cap+ on Bottom Layer "HV Cap+" (solid, remove dead copper, pour order 83): 1308.89,185.57 1308.89,351 1204.89,455 530.89,455 530.89,153.02 1273.18,152.96
NetD4_2 on Bottom Layer "NETD4_2_L02_P085" (solid, remove dead copper, pour order 85): 1333.89,1231 1333.89,1454 1050.89,1454 1050.89,1231
NetL1_2 on Bottom Layer "NETL1_2_L02_P087" (solid, remove dead copper, pour order 87): 1405.89,1488 1405.89,1144 1706.89,1144 1709.89,1147 1709.89,1488
Vs on Bottom Layer "VS_L02_P089" (solid, remove dead copper, pour order 89): 1057.89,1498 618.89,1498 618.89,975.12 792.01,975.12 793.89,1043 792.01,1239 1057.89,1241
Source on Bottom Layer "SOURCE_L02_P104" (solid, remove dead copper, pour order 104): 1696.89,575 1929.76,575 1929.76,645.87 1801.02,645.87 1696.89,645.87

## Keep-outs
Keep-Out Layer:
  lines w10: 1.18,-1.18 2666.93,-1.18 2666.93,1694.88 1.18,1694.88 1.18,-1.18

## Silkscreen, mask and mechanical layers (free items; w line width, h text height)
Top Overlay:
  text "RoboIME 2022" at 357.64,1361.18 h66.93